# Altium PCB PCB.PcbDoc
Units mm, origin at the board's own origin, x right, y up, seen from the top; angles counter-clockwise.
Board outline 88.11 x 74.17 mm, 2 copper layers (Top Layer, Bottom Layer); 57 components, 31 nets, 247 pads, 6 vias.
Unrouted connection lines stored in the file: 4.
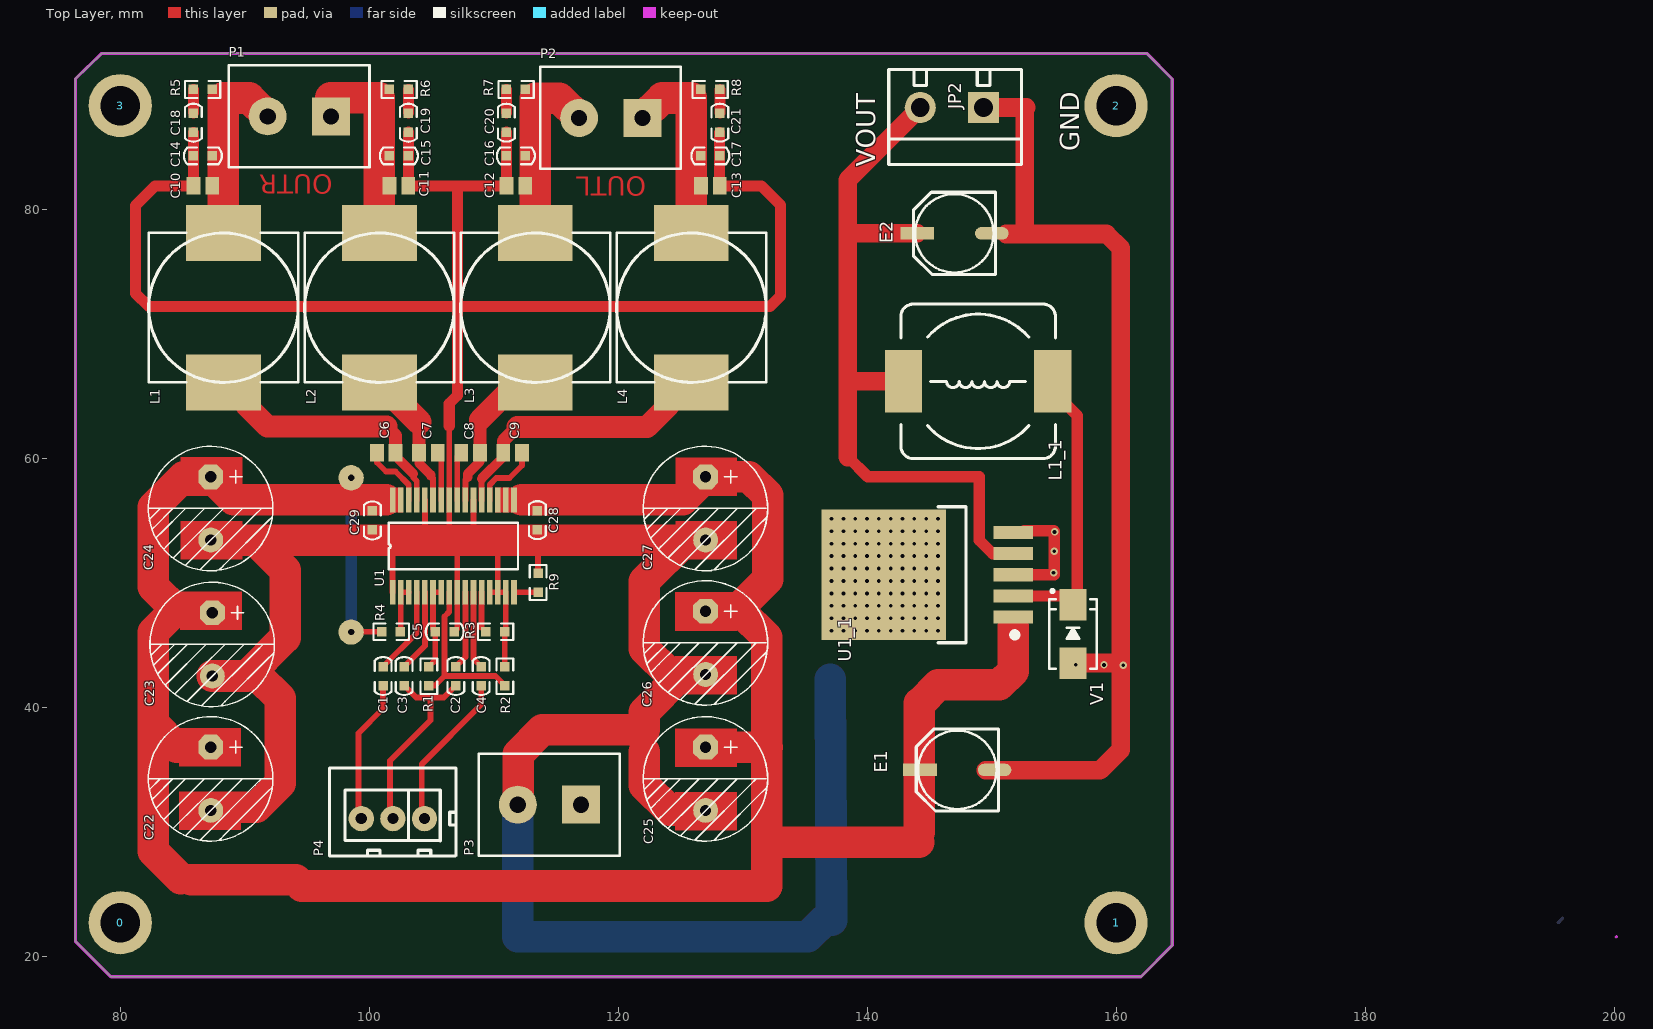
[diagram p0: Top Layer view]
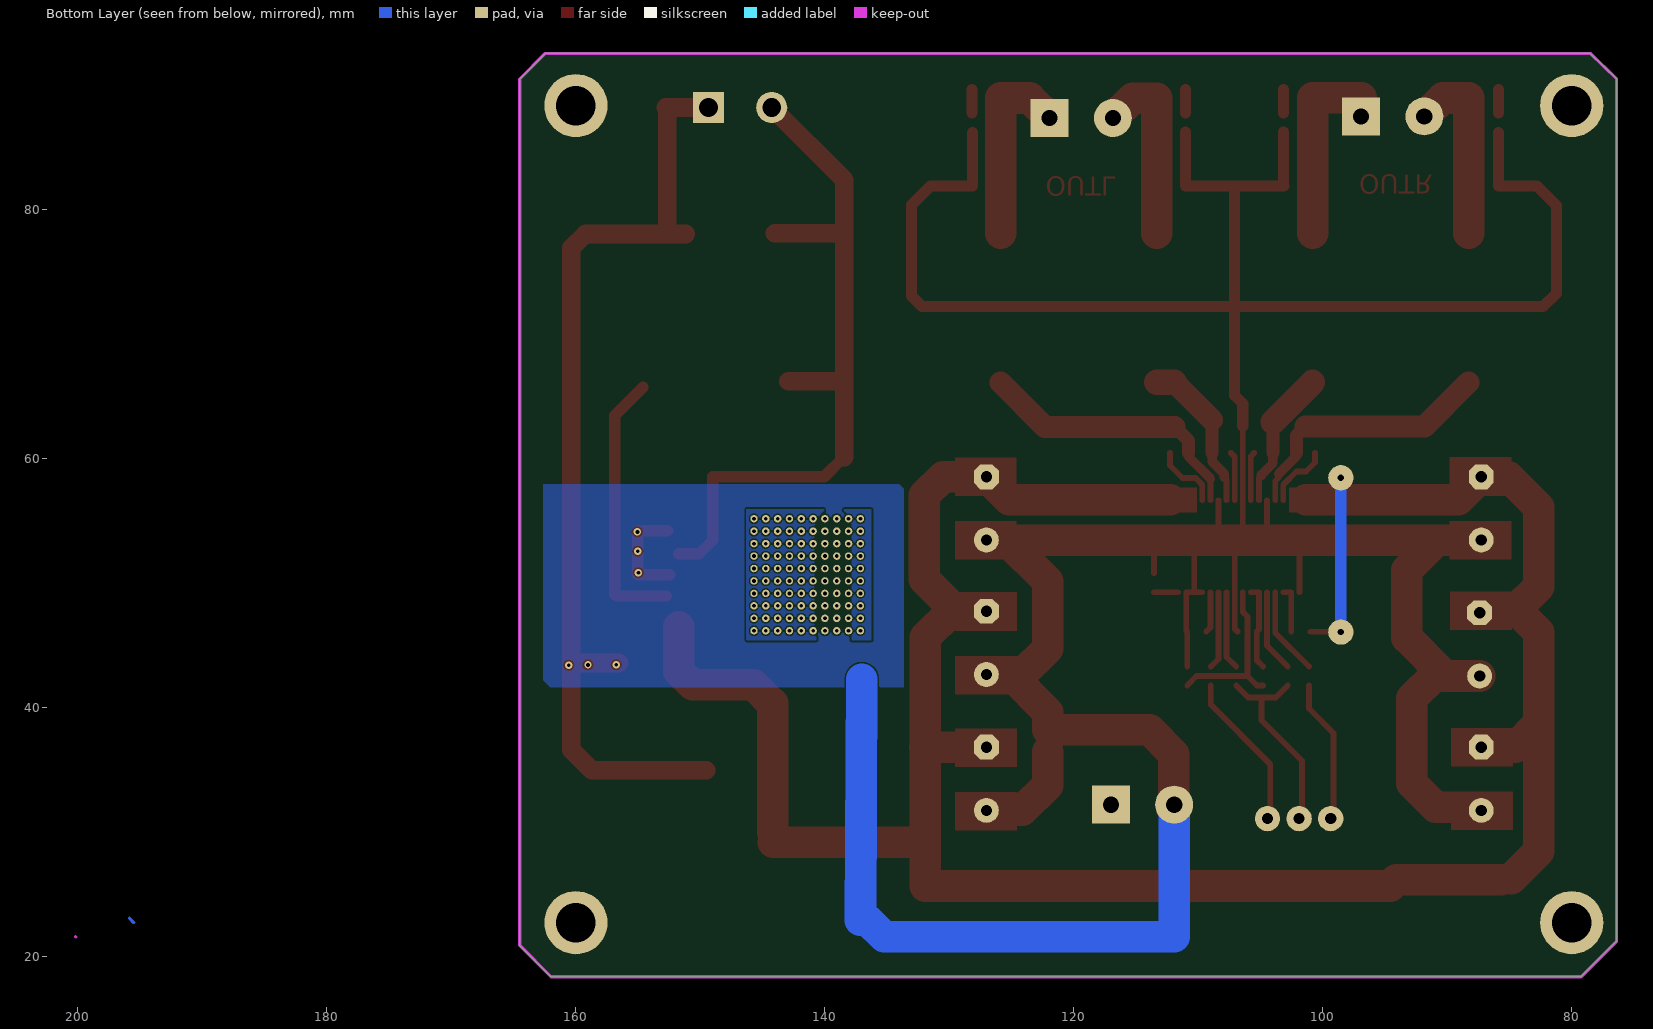
[diagram p1: Bottom Layer view, seen from below]

## Layer stack, top to bottom
Top Solder: solder mask 0.0102, Solder Resist, Dk 3.5
Top Layer: signal copper 0.0356
Dielectric 1: dielectric 0.32, FR-4, Dk 4.8
Bottom Layer: signal copper 0.0356
Bottom Solder: solder mask 0.0102, Solder Resist, Dk 3.5

## Board outline
76.403,21.234 76.403,90.526 78.511,92.558 162.458,92.558 164.516,90.5 164.516,20.904 162.001,18.39 79.248,18.39

## Design rules (kind name [scope] priority, off if disabled: settings)
Clearance [All] p1: gap=0.127 ignorepadtopadclearanceinfootprint=FALSE except(0: Arc-Hole Track-Hole SMDPad-Hole THPad-Hole Via-Hole Fill-Hole Poly-Hole Region-Hole Text-Hole)
PolygonConnect [All] p1: connectstyle=Relief reliefconductorwidth=0.254 reliefentries=4 polygonreliefangle="90 Angle" airgapwidth=0.254
RoutingVias [All] p1: holewidth=0.711 width=1.27 viastyle="Through Hole" minholewidth=0.711 minwidth=1.27 maxholewidth=0.711 maxwidth=1.27
SolderMaskExpansion [All] p1: expansion=0.102
Width [All] p1: maxlimit=12.7 minlimit=0.254 preferedwidth=0.508 minimp=50.000000 maximp=50.000000 favimp=50.000000
30 further rules are at their usual default settings.

## Classes and differential pairs
component class PCB: 1 2 3 C1 C2 C3 C4 C5 C14 C15 C16 C17 C18 C19 C20 C21 C22 C24 C25 C26 C27 C28 C29 E1 E2 L1 L2 L3 L4 P1 P2 P4 R1 R2 R3 R4 R5 R6 R7 R8 R9 U1

## Components (designator, comment, footprint, x,y, rotation, side; value= is the part's Value field where it differs from the comment)
0 "M3" "M3 125X200"#1 82.067,22.733 r0 top
1 "M3" "M3 125X200"#2 157.353,23.774 r0 top
2 "M3" "M3 125X200"#3 195.859,80.797 r0 top
3 "M3" "M3 125X200"#4 80.34,88.367 r0 top
C1 "Cap Pol1" C0603 101.117,41.783 r90 top value=1uF
C2 "Cap Pol1" C0603 106.959,41.783 r90 top value=1uF
C3 "Cap Pol1" C0603 102.811,41.783 r90 top value=1uF
C4 "Cap Pol1" C0603 108.991,41.783 r90 top value=1uF
C5 "Cap Pol1" C0603 105.308,46.101 r0 top value=1uF
C6 "Cap" C0805 101.371,60.477 r0 top value=220nF
C7 "Cap" C0805 104.758,60.477 r180 top value=220nF
C8 "Cap" C0805 108.145,60.477 r0 top value=220nF
C9 "Cap" C0805 111.531,60.477 r180 top value=220nF
C10 "Cap" C0805 86.639,81.915 r0 top value=680nF
C11 "Cap" C0805 102.387,81.915 r0 top value=680nF
C12 "Cap" C0805 111.785,81.915 r0 top value=680nF
C13 "Cap" C0805 127.406,81.915 r0 top value=680nF
C14 "Cap" C0603 85.877,84.328 r0 top value=1nF
C15 "Cap" C0603 101.625,84.328 r0 top value=1nF
C16 "Cap" C0603 111.023,84.328 r0 top value=1nF
C17 "Cap" C0603 126.644,84.328 r0 top value=1nF
C18 "Cap" C0603 85.877,87.757 r270 top value=10nF
C19 "Cap" C0603 103.149,87.757 r270 top value=10nF
C20 "Cap" C0603 111.023,86.233 r90 top value=10nF
C21 "Cap" C0603 128.168,86.233 r90 top value=10nF
C22 "Cap Pol1" EC-470/25 87.274,36.83 r0 top value=470uF
C23 "Cap Pol1" EC-470/25 87.401,47.625 r0 top value=470uF
C24 "Cap Pol1" EC-470/25 87.274,58.547 r0 top value=470uF
C25 "Cap Pol1" EC-470/25 127.025,36.83 r0 top value=470uF
C26 "Cap Pol1" EC-470/25 127.025,47.752 r0 top value=470uF
C27 "Cap Pol1" EC-470/25 127.025,58.547 r0 top value=470uF
C28 "Cap" C0603 113.513,54.305 r90 top value=100nF
C29 "Cap" C0603 100.254,54.28 r90 top value=100nF
E1 "220uF/16V" "CM D(6.3*5.4)" 147.244,35.001 r180 top
E2 "220uF/16V" "CM D(6.3*7.7)" 147.015,78.105 r180 top
JP2 "HDR-1X2" KF301-2P 149.352,88.214 r180 top
L1 "Inductor" L-12*12mm-S 88.29,72.136 r90 top value=10uH
L1_1 "33uH" CDRH127 148.92,66.218 r180 top
L2 "Inductor" L-12*12mm-S 100.821,72.136 r90 top value=10uH
L3 "Inductor" L-12*12mm-S 113.352,72.136 r90 top value=10uH
L4 "Inductor" L-12*12mm-S 125.882,72.136 r90 top value=10uH
P1 "Header 2" HX5.08-2 96.926,87.503 r180 top
P2 "Header 2" HX5.08-2 121.945,87.376 r180 top
P3 "Header 2" HX5.08-2 117.018,32.207 r180 top
P4 "Header 3" HX2.54-3 104.445,31.09 r180 top
R1 "Res2" R0603 104.8,41.783 r90 top value=100K
R2 "Res2" R0603 110.896,41.783 r90 top value=39K
R3 "Res2" R0603 110.896,46.101 r180 top value=100K
R4 "Res2" R0603 102.514,46.101 r180 top value=100K
R5 "Res2" R0603 85.877,89.662 r0 top value=3.3R
R6 "Res2" R0603 103.149,89.662 r180 top value=3.3R
R7 "Res2" R0603 112.547,89.662 r180 top value=3.3R
R8 "Res2" R0603 126.644,89.662 r0 top value=3.3R
R9 "Res2" R0603 113.563,50.8 r270 top value=10K
U1 "TPA3116" HTSSOP32 101.879,49.276 r90 top
U1_1 "LM2596" LM2596 151.744,50.681 r90 top
V1 "SS54" SMB 156.54,45.923 r90 top

## Footprints (in the part's own frame and the unit in brackets; to place one, negate y for a bottom-side part, rotate by r counter-clockwise, add the part's x,y. Pads: shape width x height; smd on the part's side, far side on the other; paste and mask are expansions set on the pad)
C0603 [mil]
  rect 30x30 smd: 1(0,0) 2(60,0)
  silkscreen extent -30,-27 90,27, body extent -1,-16 62,15, height 24
C0805 [mm] "Chip Capacitor, Body 2.0x1.3mm, IPC High Density"
  rect 1.1x1.4 smd: 1(-0.75,0) 2(0.75,0)
  body extent -1.1,-0.72 1.1,0.72, height 1.4
CDRH127 [mm] "12*12*8mm（长宽高）"
  rect 3x5 smd: 1(-6,0) 2(6,0)
  silkscreen extent -6.2,-6.2 6.2,6.2, body extent -6,-6 6,6, height 7.8
"CM D(6.3*5.4)" [mm] "贴片电解电容，直径6.3mm，高5.4mm"
  rect 2.7x1 smd: 1(3,0)
  oval 2.7x1 smd: 2(-3,0)
  silkscreen extent -3.3,-3.3 3.3,3.3, body extent -3.5,-3.3 3.5,3.3, height 5.4
"CM D(6.3*7.7)" [mm] "贴片电解电容，直径6.3mm，高7.7mm"
  rect 2.7x1 smd: 1(3,0)
  oval 2.7x1 smd: 2(-3,0)
  silkscreen extent -3.3,-3.3 3.3,3.3, body extent -3.5,-3.3 3.5,3.3, height 7.7
EC-470/25 [mm]
  oct 2x2 hole 0.9: 1(0,0)
  round 2 hole 0.9: 2(0,-5.08)
  silkscreen extent -5.01,-7.54 4.99,2.45, body extent -5.05,-7.62 5,2.43, height 16.53
HTSSOP32 [mm]
  rect 2x0.45 smd: 1(0,0) 2(0,-0.65) 3(0,-1.3) 4(0,-1.95) 5(0,-2.6) 6(0,-3.25) 7(0,-3.9) 8(0,-4.55) 9(0,-5.2) 10(0,-5.85) 11(0,-6.5) 12(0,-7.15) 13(0,-7.8) 14(0,-8.45) 15(0,-9.1) 16(0,-9.75) 17(7.4,-9.75) 18(7.4,-9.1) 19(7.4,-8.45) 20(7.4,-7.8) 21(7.4,-7.15) 22(7.4,-6.5) 23(7.4,-5.85) 24(7.4,-5.2) 25(7.4,-4.55) 26(7.4,-3.9) 27(7.4,-3.25) 28(7.4,-2.6) 29(7.4,-1.95) 30(7.4,-1.3) 31(7.4,-0.65) 32(7.4,0)
  silkscreen extent 1.84,-10.08 5.57,0.33
HX2.54-3 [mil]
  round 80 hole 35.43: 1(0,0) 2(100,0) 3(200,0)
  silkscreen extent -100,-160 300,118, body extent -95,-141 299,95, height 276
HX5.08-2 [mil]
  rect 120x120 hole 51.18: 1(0,0)
  round 120 hole 51.18: 2(200,0)
  silkscreen extent -122,-161 323,161, body extent -122,-134 325,161, height 91
KF301-2P [mm] "可拼接端子/6A"
  rect 2.5x2.5 hole 1.5: 1(0,0)
  round 2.5 hole 1.5: 2(5.08,0)
  silkscreen extent -3.05,-3.05 7.62,4.57, body extent -2.87,-3 7.63,4.6, height 10.05
L-12*12mm-S [mm]
  rect 4.5x6 smd: 1(-6,0) 2(6,0)
  silkscreen extent -6,-6 6,6, body extent -6.05,-5.94 5.95,6.06, height 8
LM2596 [mm] "3A降压芯片"
  rect 1.05x3.2 smd: 1(-3.4,0.01) 2(-1.7,0.01) 3(0,0.01) 4(1.7,0.01) 5(3.4,0.01)
  round 0.6 hole 0.3: 3(-4.5,6.05) 3(-4.5,7) 3(-4.5,7.95) 3(-4.5,8.9) 3(-4.5,9.85) 3(-4.5,10.8) 3(-4.5,11.75) 3(-4.5,12.7) 3(-4.5,13.65) 3(-4.5,14.6) 3(-3.5,6.05) 3(-3.5,7) 3(-3.5,7.95) 3(-3.5,8.9) 3(-3.5,9.85) 3(-3.5,10.8) 3(-3.5,11.75) 3(-3.5,12.7) 3(-3.5,13.65) 3(-3.5,14.6) 3(-2.5,8.9) 3(-2.5,9.85) 3(-2.5,10.8) 3(-2.5,11.75) 3(-2.5,12.7) 3(-2.5,13.65) 3(-2.5,14.6) 3(-2.5,6.05) 3(-2.5,7) 3(-2.5,7.95) 3(-1.5,13.65) 3(-1.5,14.6) 3(-1.5,10.8) 3(-1.5,11.75) 3(-1.5,12.7) 3(-1.5,7.95) 3(-1.5,8.9) 3(-1.5,9.85) 3(-1.5,6.05) 3(-1.5,7) 3(-0.5,14.6) 3(-0.5,12.7) 3(-0.5,13.65) 3(-0.5,11.75) 3(-0.5,9.85) 3(-0.5,10.8) 3(-0.5,8.9) 3(-0.5,7) 3(-0.5,7.95) 3(-0.5,6.05) 3(0.5,14.6) 3(0.5,12.7) 3(0.5,13.65) 3(0.5,11.75) 3(0.5,9.85) 3(0.5,10.8) 3(0.5,8.9) 3(0.5,7) 3(0.5,7.95) 3(0.5,6.05) 3(1.5,13.65) 3(1.5,14.6) 3(1.5,10.8) 3(1.5,11.75) 3(1.5,12.7) 3(1.5,7.95) 3(1.5,8.9) 3(1.5,9.85) 3(1.5,6.05) 3(1.5,7) 3(2.5,8.9) 3(2.5,9.85) 3(2.5,10.8) 3(2.5,11.75) 3(2.5,12.7) 3(2.5,13.65) 3(2.5,14.6) 3(2.5,6.05) 3(2.5,7) 3(2.5,7.95) 3(3.5,6.05) 3(3.5,7) 3(3.5,7.95) 3(3.5,8.9) 3(3.5,9.85) 3(3.5,10.8) 3(3.5,11.75) 3(3.5,12.7) 3(3.5,13.65) 3(3.5,14.6) 3(4.5,6.05) 3(4.5,7) 3(4.5,7.95) 3(4.5,8.9) 3(4.5,9.85) 3(4.5,10.8) 3(4.5,11.75) 3(4.5,12.7) 3(4.5,13.65) 3(4.5,14.6)
  rect 10.45x10 smd: 3(0,10.424)
  silkscreen extent -5.46,-0.32 5.46,6.05, body extent -5,0 5,13.33, height 4.5
"M3 125X200"#1 [mm] "M3螺丝孔，孔125Mil，焊盘200Mil"
  round 5.08 hole 3.175: 0(-2.067,0)
"M3 125X200"#2 [mm] "M3螺丝孔，孔125Mil，焊盘200Mil"
  round 5.08 hole 3.175: 0(2.647,-1.041)
"M3 125X200"#3 [mm] "M3螺丝孔，孔125Mil，焊盘200Mil"
  round 5.08 hole 3.175: 0(-35.859,7.569)
"M3 125X200"#4 [mm] "M3螺丝孔，孔125Mil，焊盘200Mil"
  round 5.08 hole 3.175: 0(-0.34,0)
R0603 [mil]
  rect 30x30 smd: 1(0,0) 2(60,0)
  silkscreen extent -26,-26 85,27, body extent -1,-16 62,15, height 18
SMB [mm] "4.7*3.9*2.2mm(长宽高，不包括引脚）"
  rect 2.5x2.2 smd: 1(-2.35,0) 2(2.35,0)
  silkscreen extent -2.8,-1.9 3.57,1.9, body extent -2.63,-1.8 2.67,1.8, height 2.35

## Part data
0 1 2 3: "铜柱孔"
C1 C2 C3 C4 C5 C22 C23 C24 C25 C26 C27: "Polarized Capacitor (Radial)", LatestRevisionDate=17-Jul-2002, LatestRevisionNote="Re-released for DXP Platform.", PackageDescription="Polarized Capacitor (Radial); 2 Leads", PackageReference=RB7.6-15, Published=8-Jun-2000, Publisher="Altium Limited"
C6 C7 C8 C9 C10 C11 C12 C13 C14 C15 C16 C17 C18 C19 C20 C21 C28 C29: "Capacitor", LatestRevisionDate=17-Jul-2002, LatestRevisionNote="Re-released for DXP Platform.", PackageDescription="Radial Cap, Thru-Hole; 2 Leads; 0.3 in Pin Spacing", PackageReference=RAD-0.3, Published=8-Jun-2000, Publisher="Altium Limited"
E1 E2: library part C-CM, "贴片电解电容"
JP2: library part "Header 2", "2P接插件"
L1_1: library part L-CDRH, "功率屏蔽电感"
P1 P2 P3: "Header, 2-Pin", LatestRevisionDate=17-Jul-2002, LatestRevisionNote="Re-released for DXP Platform.", Publisher="Altium Limited"
P4: "Header, 3-Pin", LatestRevisionDate=17-Jul-2002, LatestRevisionNote="Re-released for DXP Platform.", Publisher="Altium Limited"
R1 R2 R3 R4 R5 R6 R7 R8 R9: "Resistor", LatestRevisionDate=17-Jul-2002, LatestRevisionNote="Re-released for DXP Platform.", PackageDescription="Axial Device, Thru-Hole; 2 Leads; 0.4 in Pin Spacing", PackageReference=AXIAL-0.4, Published=8-Jun-2000, Publisher="Altium Limited"
V1: library part SS24, "肖特基二极管"
L1 L2 L3 L4: Code_IEC=1005, Code_JEITA=0402, LatestRevisionDate=29-May-2009, LatestRevisionNote="IPC-7351 Footprint Added.", PackageDescription="Chip Inductor", PackageReference=0402-A, Published=8-Jun-2000, Publisher="Altium Limited"

## Free pads (board coordinates)
  round 2.032 hole 0.508: 0(98.552,46.076) 1(98.552,58.471)

## Via types
v1: diameter 0.6, hole 0.3, Top Layer to Bottom Layer, tented both sides, 6 vias

## Nets (pads, with @x,y where several pads share a name; then routed paths per layer and width w, separated by ;. In a path a pad name is that pad's centre, name@x,y a point inside that pad or via, vN(x,y) a via of type N, cw(c..) or ccw(c..) an arc to the next point about the centre after c; other vN are vias at no path point)
GND: C5.2 C10.1 C11.2 C12.1 C13.2 C14.1 C15.2 C16.1 C17.2 C18.2 C19.2 C20.1 C21.1 C22.2 C23.2 C24.2 C25.2 C26.2 C27.2 C28.1 C29.1 P3.2 R2.2 R3.1 R9.1 U1.1 U1.9 U1.13 U1.14 U1.15 U1.22 U1.25 U1.28 | length 273.2
  Top Layer w0.457: U1.1 101.879,52.578 102.768,53.467 ; 104.479,53.541 U1.28 ; 106.429,53.541 U1.25 106.429,62.636 ; C5.2 107.079,46.348 U1.9 107.079,52.891 ; 108.379,53.541 U1.22 ; U1.13 U1.14 ; 109.753,53.467 110.329,52.891 U1.14 ; R2.2 R3.1 110.979,46.184 U1.15 U1.14 ; R9.1 113.563,53.365 113.665,53.467
  Top Layer w0.889: C18.2@85.889,86.221 C10.1 82.804,81.915 81.229,80.34 81.229,73.279 82.296,72.212 107.112,72.212 ; C11.2 107.01,81.915 107.112,81.813 ; C11.2@103.149,81.927 C15.2 C19.2 ; 106.429,62.636 106.429,64.418 107.112,65.1 107.112,72.212 ; C12.1@111.023,81.927 C16.1 C20.1 ; C12.1 107.213,81.915 107.112,81.813 ; C21.1@128.156,86.221 C13.2 131.521,81.915 133.045,80.391 133.045,73.076 132.182,72.212 107.112,72.212 ; 107.112,72.212 107.112,81.813
  Top Layer w2.54: C24.2 92.862,53.467 102.768,53.467 109.753,53.467 113.665,53.467 125.425,53.467 ; C22.2@87.325,32.004 90.932,32.004 92.862,33.934 ; P3.2@111.963,33.274 111.963,36.271 113.919,38.227 122.098,38.227 122.098,39.649 125.12,42.672 ; 122.098,36.474 122.098,33.782 124.13,31.75 C25.2 ; C26.2 125.12,42.672 ; C27.2 125.425,53.467 ; 125.12,42.672 124.181,42.672 122.098,44.755 122.098,50.14 125.425,53.467
  Bottom Layer w2.54: 137.033,42.291 137.135,22.936
NetC1_1: C1.1 P4.3 | length 11.5
  Top Layer w0.457: P4.3@99.136,31.09 99.136,37.948 101.117,39.929 C1.1
NetC1_2: C1.2 U1.4 | length 7.1
  Top Layer w0.457: C1.2 103.829,46.019 U1.4
NetC2_1: C2.1 C3.1 P4.2 | length 16
  Top Layer w0.457: P4.2@101.676,31.09 101.676,35.738 104.927,38.989 104.927,40.818 ; C3.1 103.776,40.818 104.927,40.818 ; C2.1 105.994,40.818 104.927,40.818
NetC2_2: C2.2 U1.10 | length 6.3
  Top Layer w0.457: C2.2 107.729,44.077 U1.10
NetC3_2: C3.2 U1.5 | length 6.7
  Top Layer w0.457: C3.2 104.479,44.976 U1.5
NetC4_1: C4.1 P4.1 | length 12.7
  Top Layer w0.457: P4.1@104.216,31.013 104.216,35.458 108.991,40.234 C4.1
NetC4_2: C4.2 U1.11 | length 6.2
  Top Layer w0.457: U1.11 108.379,43.919 C4.2
NetC5_1: C5.1 R1.2 U1.6 U1.7 | length 6.9
  Top Layer w0.457: R1.2 105.308,43.815 C5.1 105.129,46.28 U1.6 U1.7
NetC6_1: C6.1 U1.30 | length 5.3
  Top Layer w0.457: C6.1 100.621,59.703 101.346,58.979 102.108,58.979 103.179,57.907 U1.30
NetC6_2: C6.2 L1.1 U1.29 | length 21.5
  Top Layer w0.457: 103.556,58.776 103.556,58.471 103.829,58.197 U1.29
  Top Layer w0.762: C6.2 102.121,60.21 103.556,58.776
  Top Layer w1.067: 101.397,62.586 102.121,61.861 C6.2
  Top Layer w1.778: L1.1 91.841,62.586 101.397,62.586
NetC7_1: C7.1 U1.26 | length 3.9
  Top Layer w0.457: C7.1 105.779,60.206 U1.26
NetC7_2: C7.2 L2.1 U1.27 | length 11.2
  Top Layer w0.457: 104.927,58.623 105.129,58.421 U1.27
  Top Layer w0.762: C7.2 104.008,59.632 104.927,58.713 104.927,58.623
  Top Layer w1.067: C7.2 104.008,62.949
  Top Layer w2.032: L2.1 104.008,62.949
NetC8_1: C8.1 U1.24 | length 3.9
  Top Layer w0.457: U1.24 107.079,60.162 C8.1
NetC8_2: C8.2 L3.1 U1.23 | length 12.6
  Top Layer w0.457: U1.23 107.729,58.326 107.899,58.496
  Top Layer w0.762: 107.899,58.496 107.899,58.776 108.895,59.771 C8.2
  Top Layer w1.067: C8.2 108.895,63.124
  Top Layer w1.778: 108.895,63.124 L3.1@111.907,66.136
  Top Layer w2.032: L3.1@111.907,66.136 L3.1
NetC9_1: C9.1 U1.20 | length 5.5
  Top Layer w0.457: U1.20 109.679,57.914 110.211,58.445 111.277,58.445 112.281,59.449 C9.1
NetC9_2: C9.2 L4.1 U1.21 | length 22.5
  Top Layer w0.457: U1.21 109.029,58.407
  Top Layer w0.762: 109.029,58.407 110.781,60.159 C9.2
  Top Layer w1.067: C9.2 110.781,61.429 111.912,62.56
  Top Layer w1.778: 111.912,62.56 122.307,62.56 L4.1
NetC10_2: C10.2 C14.2 L1.2 P1.2 R5.2 | length 15
  Top Layer w2.54: L1.2 88.29,88.976 90.373,88.976 P1.2
NetC11_1: C11.1 C15.1 L2.2 P1.1 R6.2 | length 16.2
  Top Layer w2.54: P1.1 96.926,88.985 100.821,88.985 100.821,84.328 L2.2
NetC12_2: C12.2 C16.2 L3.2 P2.2 R7.1 | length 15
  Top Layer w2.54: L3.2 113.352,88.968 115.274,88.968 P2.2
NetC13_1: C13.1 C17.1 L4.2 P2.1 R8.1 | length 15.4
  Top Layer w2.54: P2.1 123.546,88.976 125.882,88.976 L4.2
NetC18_1: C18.1 R5.1 | length 1.9
  Top Layer w0.889: C18.1 R5.1
NetC19_1: C19.1 R6.1 | length 1.9
  Top Layer w0.889: C19.1 R6.1
NetC20_2: C20.2 R7.2 | length 1.9
  Top Layer w0.889: C20.2 R7.2
NetC21_2: C21.2 R8.2 | length 1.9
  Top Layer w0.889: C21.2 R8.2
NetD1_1: 
NetR1_1: R1.1 R2.1 U1.8 | length 13.6
  Top Layer w0.457: R1.1 105.283,41.783 106.045,42.545 ; U1.8 106.429,47.705 106.045,47.32 106.045,42.545 ; R2.1 110.134,42.545 106.045,42.545
NetR3_2: R3.2 U1.12 | length 3.3
  Top Layer w0.457: U1.12 109.029,46.444 R3.2
NetR4_1: R4.1 U1.2 U1.3 | length 3.8
  Top Layer w0.457: R4.1@102.529,46.116 U1.2 U1.3
NetR9_2: R9.2 U1.16 | length 1.9
  Top Layer w0.457: U1.16 R9.2
VCC: C22.1 C23.1 C24.1 C25.1 C26.1 C27.1 C28.2 C29.2 P3.1 pad.0 pad.1 R4.2 U1.17 U1.18 U1.19 U1.31 U1.32 | length 186
  Top Layer w0.457: pad.0 98.577,46.101 R4.2
  Top Layer w2.54: 84.861,26.264 82.652,28.473 82.652,38.735 ; 85.7,26.187 94.082,26.187 94.59,25.679 131.928,25.679 131.928,36.83 ; 86.081,47.777 84.607,47.777 ; C22.1 84.557,36.83 82.652,38.735 ; C23.1@87.274,47.752 84.633,47.752 84.607,47.777 ; 101.346,56.693 89.129,56.693 C24.1 85.09,58.547 82.652,56.109 82.652,49.733 84.607,47.777 ; 112.243,56.718 125.197,56.718 C27.1 130.505,58.547 132.004,57.048 132.004,50.317 129.438,47.752 ; C25.1 131.928,36.83 ; C26.1 129.438,47.752 ; 131.978,36.83 131.928,36.83 ; 82.652,38.735 82.652,46.05 84.379,47.777 84.607,47.777 ; 129.438,47.752 129.819,47.752 131.928,45.644 131.928,36.83
  Bottom Layer w0.914: pad.0 pad.1
pads on no net: 0.0 1.0 2.0 3.0 E1.1 E1.2 E2.1 E2.2 JP2.1 JP2.2 L1_1.1 L1_1.2 U1_1.1 U1_1.2 U1_1.3 U1_1.4 U1_1.5 V1.1 V1.2
copper on no net: | length 275.8
  Top Layer w0.254: 87.274,53.467 90.83,53.467 ; 87.401,42.545 91.059,42.545 ; 138.303,66.37 138.455,66.218 ; v1@155.016,54.204 v1@155.042,54.178 ; 156.769,48.971 156.566,48.768 156.876,49.078 ; 128.626,25.679 128.626,25.857 128.626,25.679
  Top Layer w0.914: 138.455,60.139 140.047,58.547 149.022,58.547 149.022,53.442 150.082,52.381 151.734,52.381 ; 144.221,39.218 144.221,40.335 ; 152.476,50.673 155.042,50.673 v1@155.042,54.178 ; 152.629,54.204 v1@155.016,54.204 ; 152.756,48.971 156.769,48.971 ; 154.61,65.735 156.876,63.469 156.876,49.078
  Top Layer w1.5: 138.455,60.139 138.455,64.623 138.455,76.406 138.455,82.398 144.272,88.214 ; 138.455,66.218 142.92,66.218 ; 138.608,78.105 144.015,78.105 ; 149.352,88.214 152.781,88.214 ; 151.184,78.054 159.233,78.054 160.363,76.923 160.363,43.573 160.363,36.615 ; 152.654,78.054 152.654,88.214
  Top Layer w1.524: 149.53,34.976 158.725,34.976 160.363,36.615 ; v1@156.54,43.573 v1@160.363,43.573
  Top Layer w2.54: 87.401,42.545 90.17,42.545 93.269,45.644 93.269,51.029 90.83,53.467 ; 91.059,42.545 92.862,40.742 92.862,33.934 ; 131.953,29.185 144.145,29.185 ; 144.196,29.997 144.196,40.361 ; 144.221,40.335 145.72,41.834 150.622,41.834 151.734,42.946 151.734,46.507
  Bottom Layer w0.254: 80.061,22.631 80.34,22.911 ; 136.576,22.936 137.135,22.936 ; 195.504,22.733 195.859,23.089
  Bottom Layer w2.54: 111.938,32.207 111.938,21.592 135.231,21.592 136.576,22.936
  other v1: 160.579,43.409 159.029,43.434 156.769,43.459 154.979,50.848 155.042,52.578 155.06,54.123

## Polygon pours and split planes (outlines as drawn)
no net on Bottom Layer (solid, pour order 12): 133.655,41.631 162.636,41.631 162.636,57.937 134.01,57.937 133.655,57.582
no net on Bottom Layer (solid, pour order 10): 149.276,47.904
no net on Bottom Layer (solid, pour order 8): 138.049,61.011
no net on Bottom Layer (solid, pour order 0): 136.296,55.956 146.304,55.956 146.304,45.466 146.355,45.415 136.271,45.415 136.271,55.931

## Keep-outs
Keep-Out Layer:
  lines w0.254: 200.165,21.577 200.203,21.615 ; 76.403,21.234 79.248,18.39 162.001,18.39 164.516,20.904 164.516,90.5 162.458,92.558 78.511,92.558 76.403,90.526 76.403,21.234

## Other copper
Top Layer:
  region net GND: 89.713,30.175 89.713,33.274 84.734,33.274 84.734,30.175
  region net VCC: 89.713,35.281 89.713,38.379 84.734,38.379 84.734,35.281
  region net VCC: 89.789,46.228 89.789,49.327 84.811,49.327 84.811,46.228
  region net VCC: 89.84,57.023 89.84,60.122 84.861,60.122 84.861,57.023
  region net GND: 89.84,51.918 89.84,55.016 84.861,55.016 84.861,51.918
  region net VCC: 129.54,35.23 129.54,38.329 124.562,38.329 124.562,35.23
  region net GND: 129.54,30.124 129.54,33.223 124.562,33.223 124.562,30.124
  region net VCC: 129.54,46.177 129.54,49.276 124.562,49.276 124.562,46.177
  region net GND: 129.54,41.072 129.54,44.171 124.562,44.171 124.562,41.072
  region net VCC: 129.565,56.998 129.565,60.096 124.587,60.096 124.587,56.998
  region net GND: 129.565,51.892 129.565,54.991 124.587,54.991 124.587,51.892
  region net VCC: 111.836,55.677 111.836,57.683 110.109,57.683 110.109,55.677
  region net VCC: 102.718,55.677 102.718,57.683 101.676,57.683 101.676,55.677
  text "OUTR" at 97.079,82.829 h1.52 r180
  text "OUTL" at 122.25,82.652 h1.52 r180

## Silkscreen, mask and mechanical layers (free items; w line width, h text height)
Top Overlay:
  pour cut-out: 139.04,40.208
  text "GND" at 157.023,84.709 h1.52 r90
  text "VOUT" at 140.665,83.439 h1.52 r90